# Altium PCB doanTK.PcbDoc
Units mm, origin at the board's own origin, x right, y up, seen from the top; angles counter-clockwise.
Board outline 55.63 x 89.15 mm, 2 copper layers (Top Layer, Bottom Layer); 4 components, 5 nets, 44 pads, 4 vias.
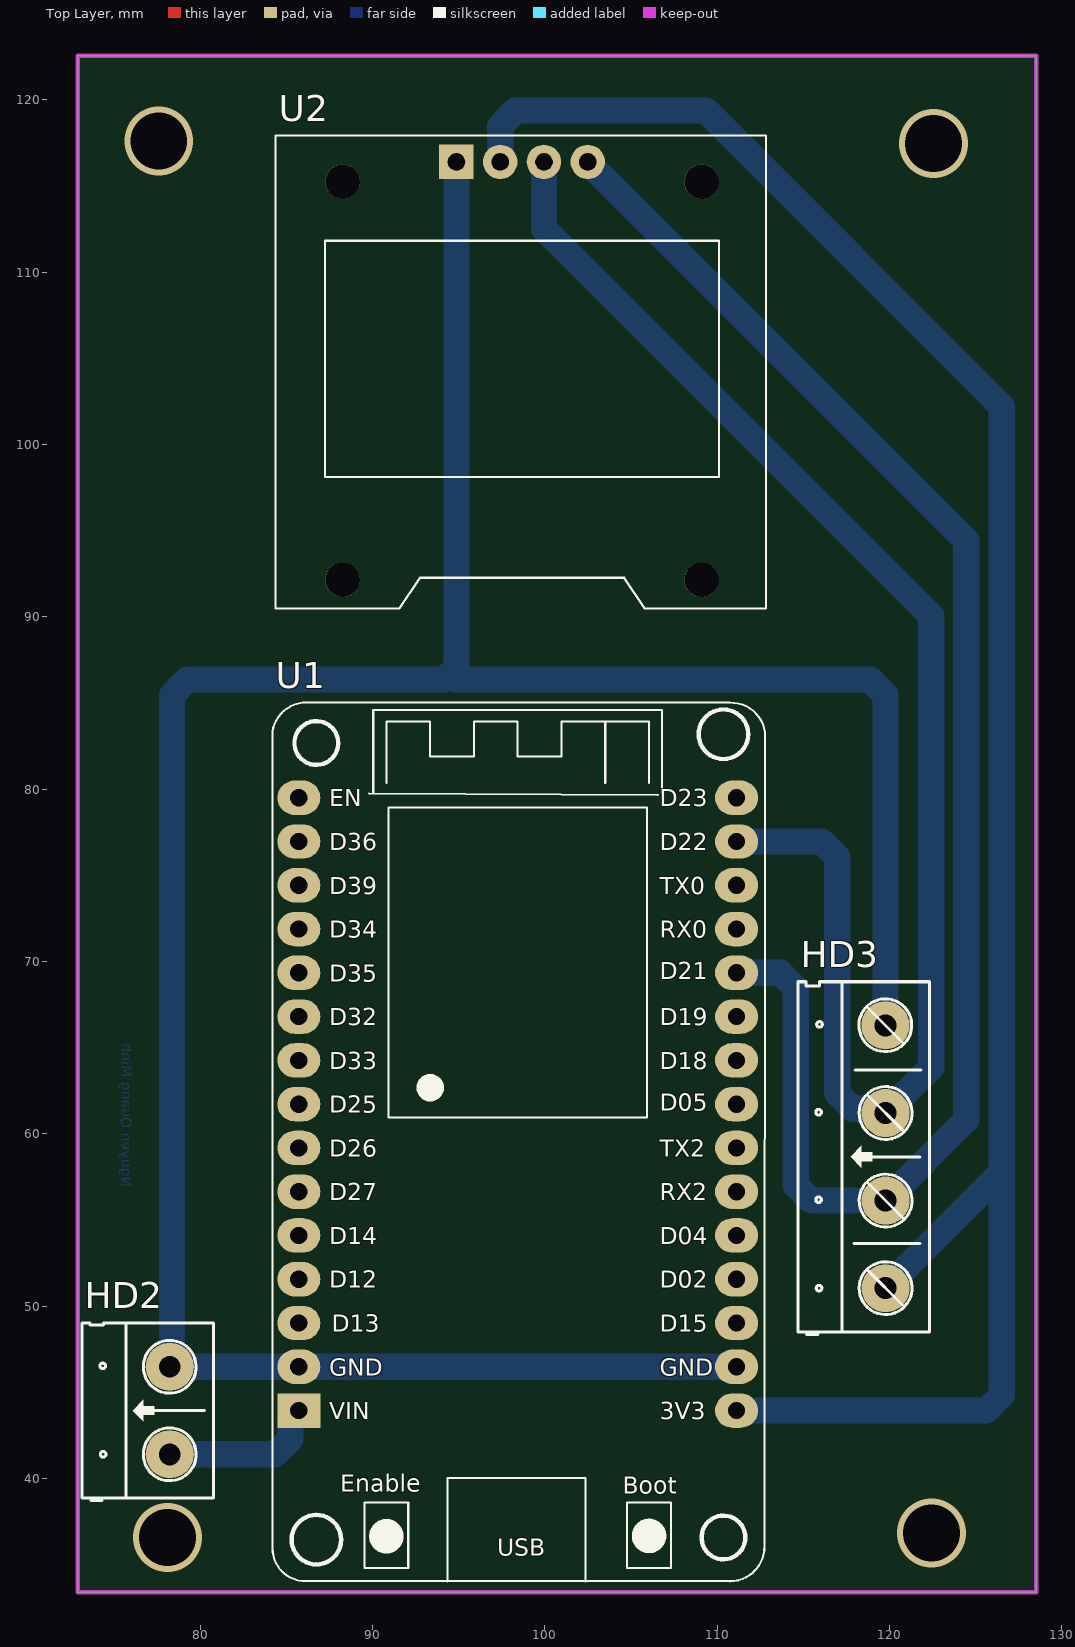
[diagram p0: Top Layer view]
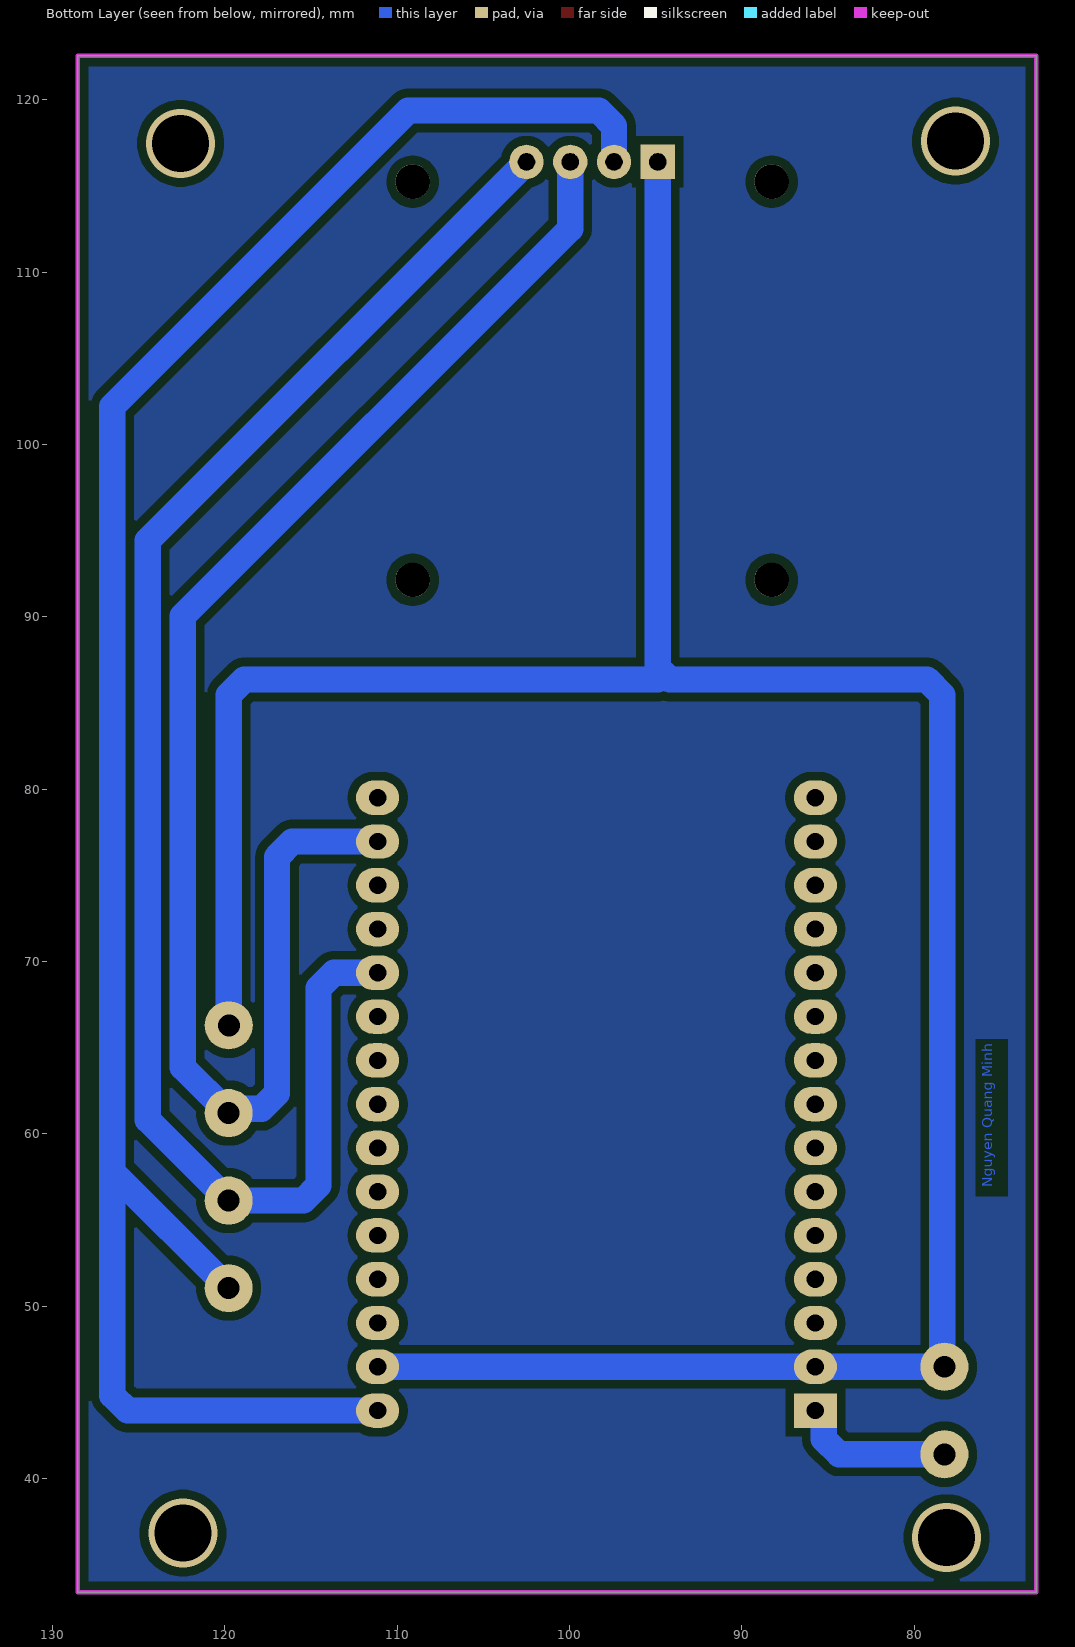
[diagram p1: Bottom Layer view, seen from below]
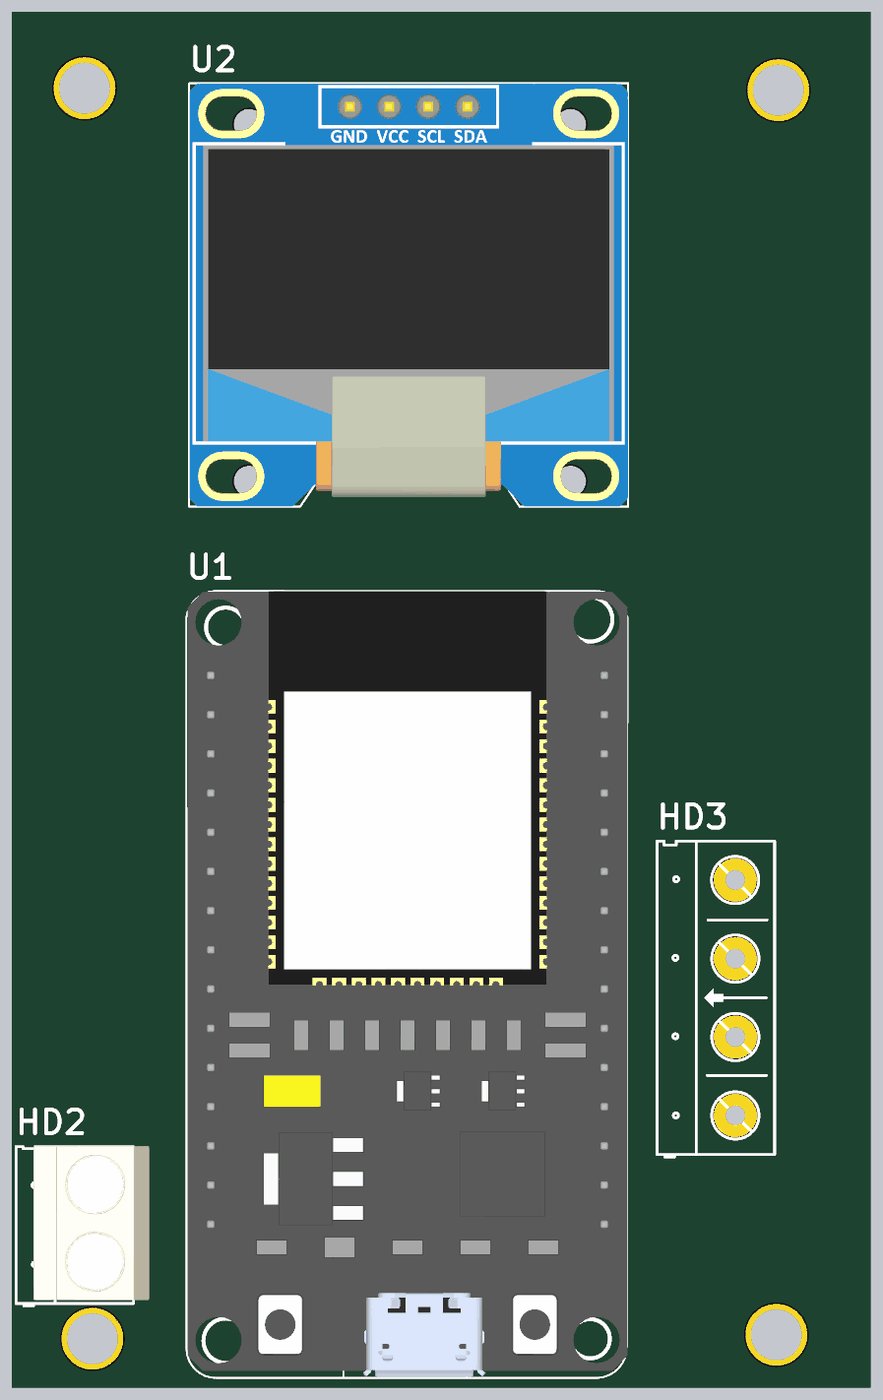
[diagram p2: 3D render of the assembled board from above, using the file's embedded part models]

## Layer stack, top to bottom
Top Solder: solder mask 0.0102, Solder Resist, Dk 3.5
Top Layer: signal copper 0.0356
Dielectric 1: dielectric 0.32, FR-4, Dk 4.8
Bottom Layer: signal copper 0.0356
Bottom Solder: solder mask 0.0102, Solder Resist, Dk 3.5

## Board outline
72.898,33.401 72.898,34.036 72.898,122.555 128.524,122.555 128.524,33.401

## Design rules (kind name [scope] priority, off if disabled: settings)
Clearance [All] p1: gap=0.508 ignorepadtopadclearanceinfootprint=FALSE
PolygonConnect [All] p1: connectstyle=Relief reliefconductorwidth=0.254 reliefentries=4 polygonreliefangle="90 Angle" airgapwidth=0.254
RoomDefinition doantk [InComponentClass('doantk')] p1: confinementstyle=ConfineIn formatcopy=TRUE lockcomponents=FALSE outline 178.943,26.797 258.699,26.797 258.699,80.899 178.943,80.899
RoutingLayers [All] p1: top layer_v5=FALSE bottom layer_v5=TRUE
RoutingVias [All] p1: holewidth=0.711 width=1.27 viastyle="Through Hole" minholewidth=0.711 minwidth=1.27 maxholewidth=0.711 maxwidth=1.27
SolderMaskExpansion [All] p1: expansion=0.102 istentingtop=FALSE
Width [All] p1: maxlimit=2.032 minlimit=0.762 preferedwidth=1.524
29 further rules are at their usual default settings.

## Components (designator, comment, footprint, x,y, rotation, side; value= is the part's Value field where it differs from the comment)
HD2 "Pin" HED2 78.232,41.402 r90 top value="Header 2"
HD3 "Max30102" HED4 119.771,51.044 r90 top value="Header 4"
U1 "ESP32_30" ESP32_30 98.425,61.722 r0 top
U2 "DISPLAY_OLED" DISPLAY_OLED 98.679,104.267 r0 top

## Footprints (in the part's own frame and the unit in brackets; to place one, negate y for a bottom-side part, rotate by r counter-clockwise, add the part's x,y. Pads: shape width x height; smd on the part's side, far side on the other; paste and mask are expansions set on the pad)
DISPLAY_OLED [mm]
  rect 2x2 hole 1: 1(-3.81,12.128)
  round 2 hole 1: 2(-1.27,12.128) 3(1.27,12.128) 4(3.81,12.128)
  round 2 hole 2 unplated: ""(-10.414,-12.128) ""(-10.414,10.986) ""(10.414,-12.128) ""(10.414,10.986)
  silkscreen extent -14.3,-13.78 14.15,13.66, body extent -14.28,-13.76 14.12,13.64, height 5.7
ESP32_30 [mm] "Microcontoller Board 30 Pins Wifi 2.4GHz BLE 4.2 ESP32-WROOM-32D"
  oval 2.5x2 hole 1: 1(-12.7,17.78) 2(-12.7,15.24) 3(-12.7,12.7) 4(-12.7,10.16) 5(-12.7,7.62) 6(-12.7,5.08) 7(-12.7,2.54) 8(-12.7,0) 9(-12.7,-2.54) 10(-12.7,-5.08) 11(-12.7,-7.62) 12(-12.7,-10.16) 13(-12.7,-12.7) 14(-12.7,-15.24) 16(12.7,17.78) 17(12.7,15.24) 18(12.7,12.7) 19(12.7,10.16) 20(12.7,7.62) 21(12.7,5.08) 22(12.7,2.54) 23(12.7,0) 24(12.7,-2.54) 25(12.7,-5.08) 26(12.7,-7.62) 27(12.7,-10.16) 28(12.7,-12.7) 29(12.7,-15.24) 30(12.7,-17.78)
  rect 2.5x2 hole 1: 15(-12.7,-17.78)
  silkscreen extent -14.23,-27.69 14.35,23.31, body extent -14.15,-27.61 14.35,23.29, height 7
HED2 [mil] "Header 2, 2 pin, hight 300mil, Pin to Pin 200, Colour Green"
  round 110 hole 50: 1(0,0) 2(200,0)
  silkscreen extent -106,-100 300,200, body extent -92,-140 302,155, height 394
HED4 [mil] "Header 4, 4 pin, hight 300mil, Pin to Pin 200, Colour Green"
  round 110 hole 50: 1(0,0) 2(200,0) 3(400.06,0.06) 4(600.39,0.39)
  silkscreen extent -106,-100 700,200

## Part data
HD2: library part Hed2, "Header 2 (Green)"
HD3: library part Hed4, "Header 4 (Green)"
U1: "Microcontoller Board 30 Pins Wifi 2.4GHz BLE 4.2 ESP32-WROOM-32D", ComponentLink1Description=Datasheet, ComponentLink1URL=https://www.mouser.com/datasheet/2/891/esp32_wroom_32d_esp32_wroom_32u_datasheet_en-1365844.pdf
U2: "Display Oled 128x64 0.96\" I2C."

## Via types
v1: diameter 4, hole 3.3, Top Layer to Bottom Layer, 4 vias

## Nets (pads, with @x,y where several pads share a name; then routed paths per layer and width w, separated by ;. In a path a pad name is that pad's centre, name@x,y a point inside that pad or via, vN(x,y) a via of type N, cw(c..) or ccw(c..) an arc to the next point about the centre after c; other vN are vias at no path point)
3V3: HD3.1 U1.30 U2.2 | length 121.4
  Bottom Layer w1.524: U2.2 97.409,118.487 98.302,119.38 109.347,119.38 126.517,102.21 126.517,57.79 ; U1.30 125.625,43.942 126.517,44.835 126.517,57.79 ; HD3.1 126.517,57.79
5V: HD2.1 U1.15 | length 9.4
  Bottom Layer w1.524: HD2.1 84.344,41.402 85.237,42.295 85.237,43.704 85.475,43.942 U1.15
GND: HD2.2 HD3.4 U1.14 U1.29 U2.1 | length 163.4
  Bottom Layer w1.524: 94.524,86.705 94.869,86.36 118.868,86.36 119.761,85.467 HD3.4 ; U2.1 94.869,87.05 94.179,86.36 79.252,86.36 78.359,85.467 78.359,46.609 HD2.2 U1.14 U1.29
SCL: HD3.3 U1.17 U2.3 | length 88.8
  Bottom Layer w1.524: U2.3 99.949,112.522 122.428,90.043 122.428,63.864 HD3.3 119.526,61.449 117.868,61.449 116.967,62.349 116.967,76.069 116.074,76.962 U1.17
SDA: HD3.2 U1.20 U2.4 | length 92.1
  Bottom Layer w1.524: U2.4 124.46,94.424 124.46,60.813 HD3.2 115.447,56.124 114.554,57.017 114.554,68.449 113.661,69.342 U1.20
pads on no net: U1.1 U1.2 U1.3 U1.4 U1.5 U1.6 U1.7 U1.8 U1.9 U1.10 U1.11 U1.12 U1.13 U1.16 U1.18 U1.19 U1.21 U1.22 U1.23 U1.24 U1.25 U1.26 U1.27 U1.28 U2.
copper on no net:
  other v1: 78.105,36.576 122.428,36.83 122.555,117.475 77.597,117.602

## Polygon pours and split planes (outlines as drawn)
no net on Bottom Layer "NONET_L02_P000" (solid, pour order 0): 73.025,122.555 128.524,122.555 128.524,33.528 128.397,33.401 72.898,33.401

## Keep-outs
Keep-Out Layer:
  the board outline again, w0.254

## Other copper
Bottom Layer:
  text "Nguyen Quang Minh" at 75.245,56.896 h1 r270

## Text inside footprints (layer, text, board x,y; h text height)
U1: Top Overlay "Enable" at 88.138,39.243 h1; Top Overlay "Boot" at 104.521,39.116 h1; Top Overlay "USB" at 97.225,35.512 h1; Top Overlay "EN" at 87.503,78.994 h1; Top Overlay "D23" at 106.68,78.994 h1; Top Overlay "D36" at 87.503,76.454 h1; Top Overlay "TX2" at 106.68,58.674 h1; Top Overlay "RX2" at 106.68,56.134 h1; Top Overlay "D15" at 106.68,48.514 h1; Top Overlay "D02" at 106.68,51.054 h1; Top Overlay "GND" at 106.68,45.974 h1; Top Overlay "D04" at 106.68,53.594 h1; Top Overlay "3V3" at 106.68,43.434 h1; Top Overlay "D39" at 87.503,73.914 h1; Top Overlay "D12" at 87.503,51.054 h1; Top Overlay "VIN" at 87.503,43.434 h1; Top Overlay "GND" at 87.503,45.974 h1; Top Overlay "D14" at 87.503,53.594 h1; Top Overlay "D27" at 87.503,56.134 h1; Top Overlay "D13" at 87.63,48.514 h1; Top Overlay "D26" at 87.503,58.674 h1; Top Overlay "D32" at 87.503,66.294 h1; Top Overlay "D34" at 87.503,71.374 h1; Top Overlay "D35" at 87.503,68.834 h1; Top Overlay "D33" at 87.503,63.754 h1; Top Overlay "D25" at 87.503,61.214 h1; Top Overlay "D19" at 106.68,66.294 h1; Top Overlay "D05" at 106.68,61.341 h1; Top Overlay "D18" at 106.68,63.754 h1; Top Overlay "D21" at 106.68,68.961 h1; Top Overlay "D22" at 106.68,76.454 h1; Top Overlay "TX0" at 106.68,73.914 h1; Top Overlay "RX0" at 106.68,71.374 h1